# Altium PCB PCB_B.PcbDoc
Units mm, origin at the board's own origin, x right, y up, seen from the top; angles counter-clockwise.
Board outline 73.25 x 85.75 mm, 2 copper layers (Top Layer, Bottom Layer); 4 components, 0 nets, 8 pads, 0 vias.
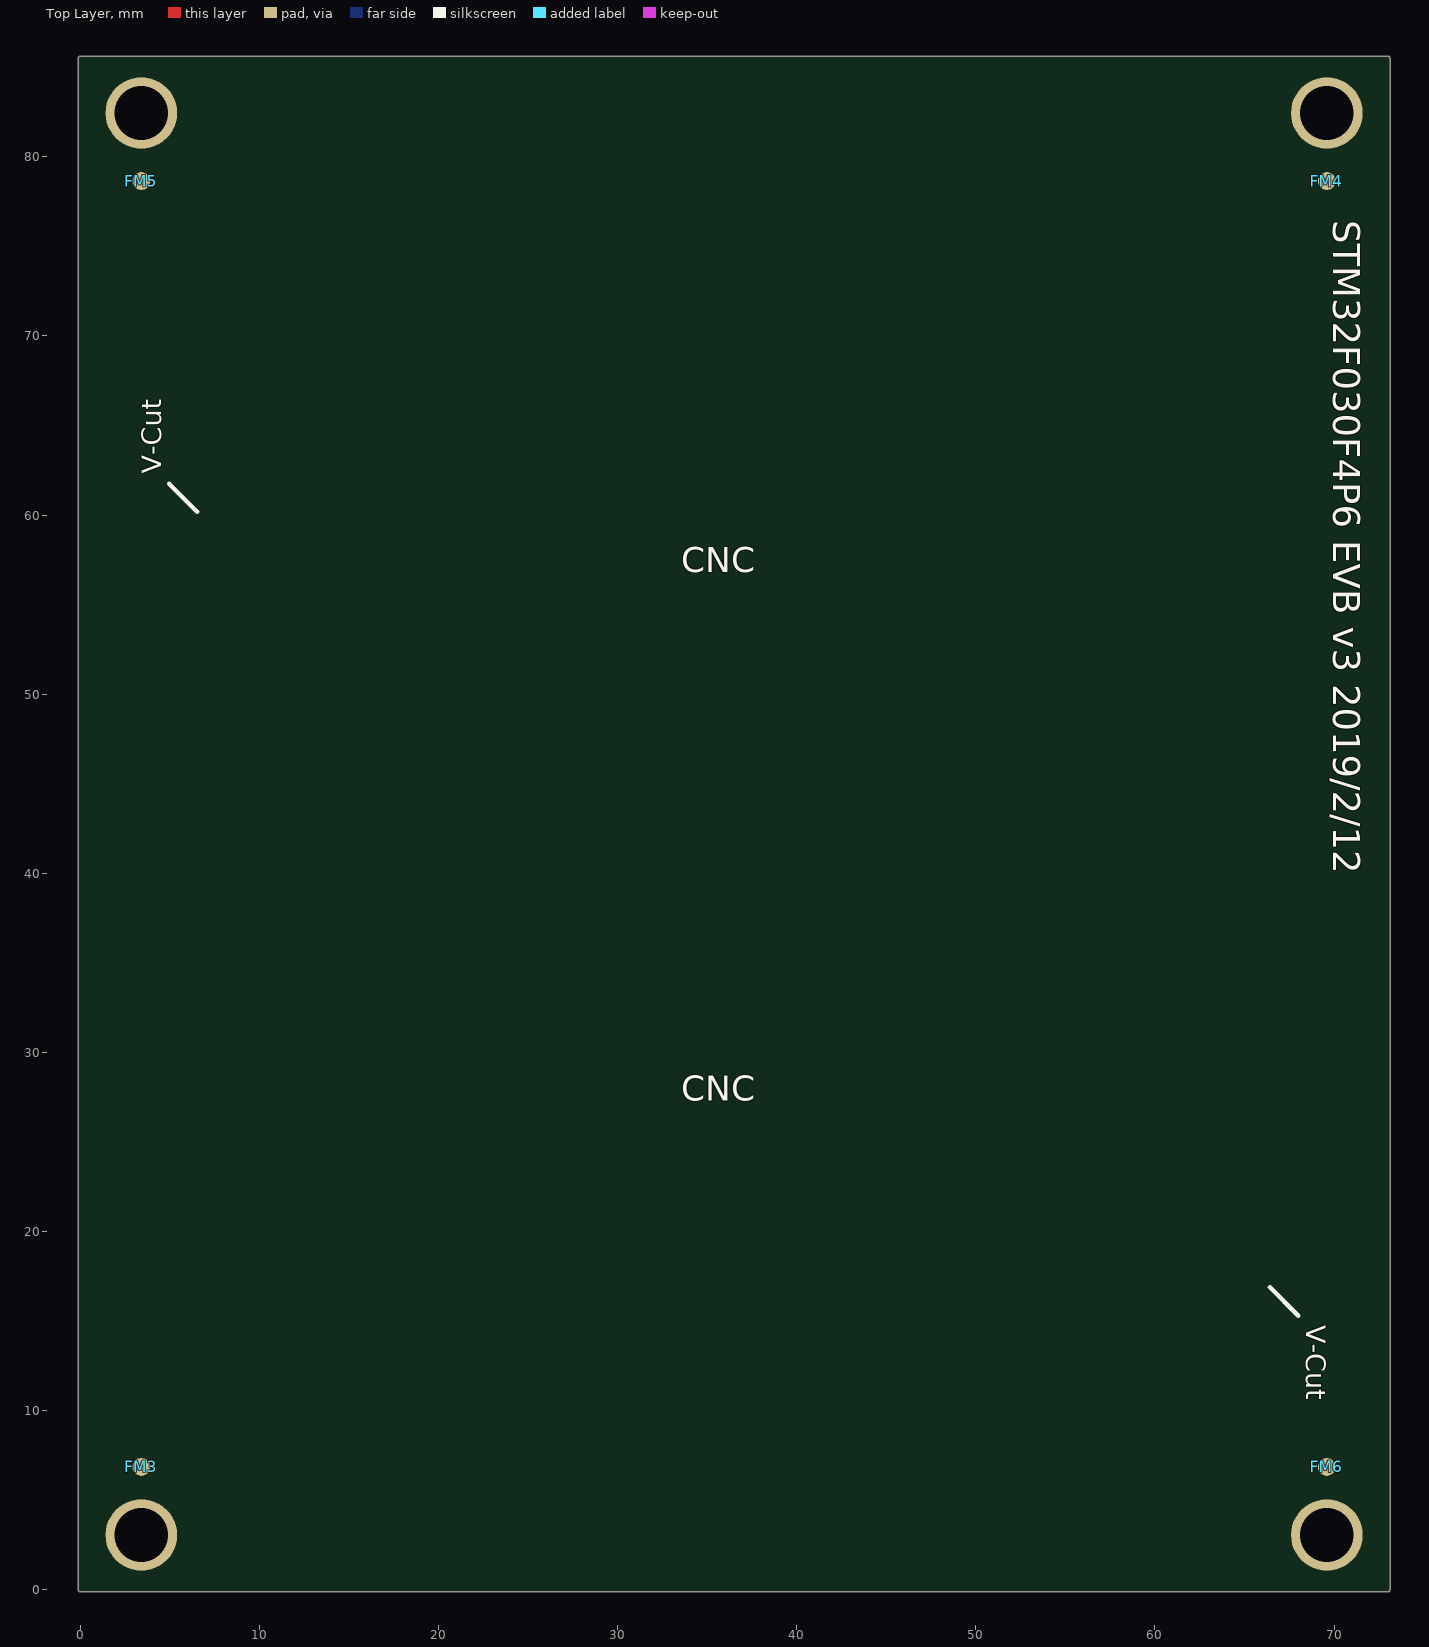
[diagram p0: Top Layer view]
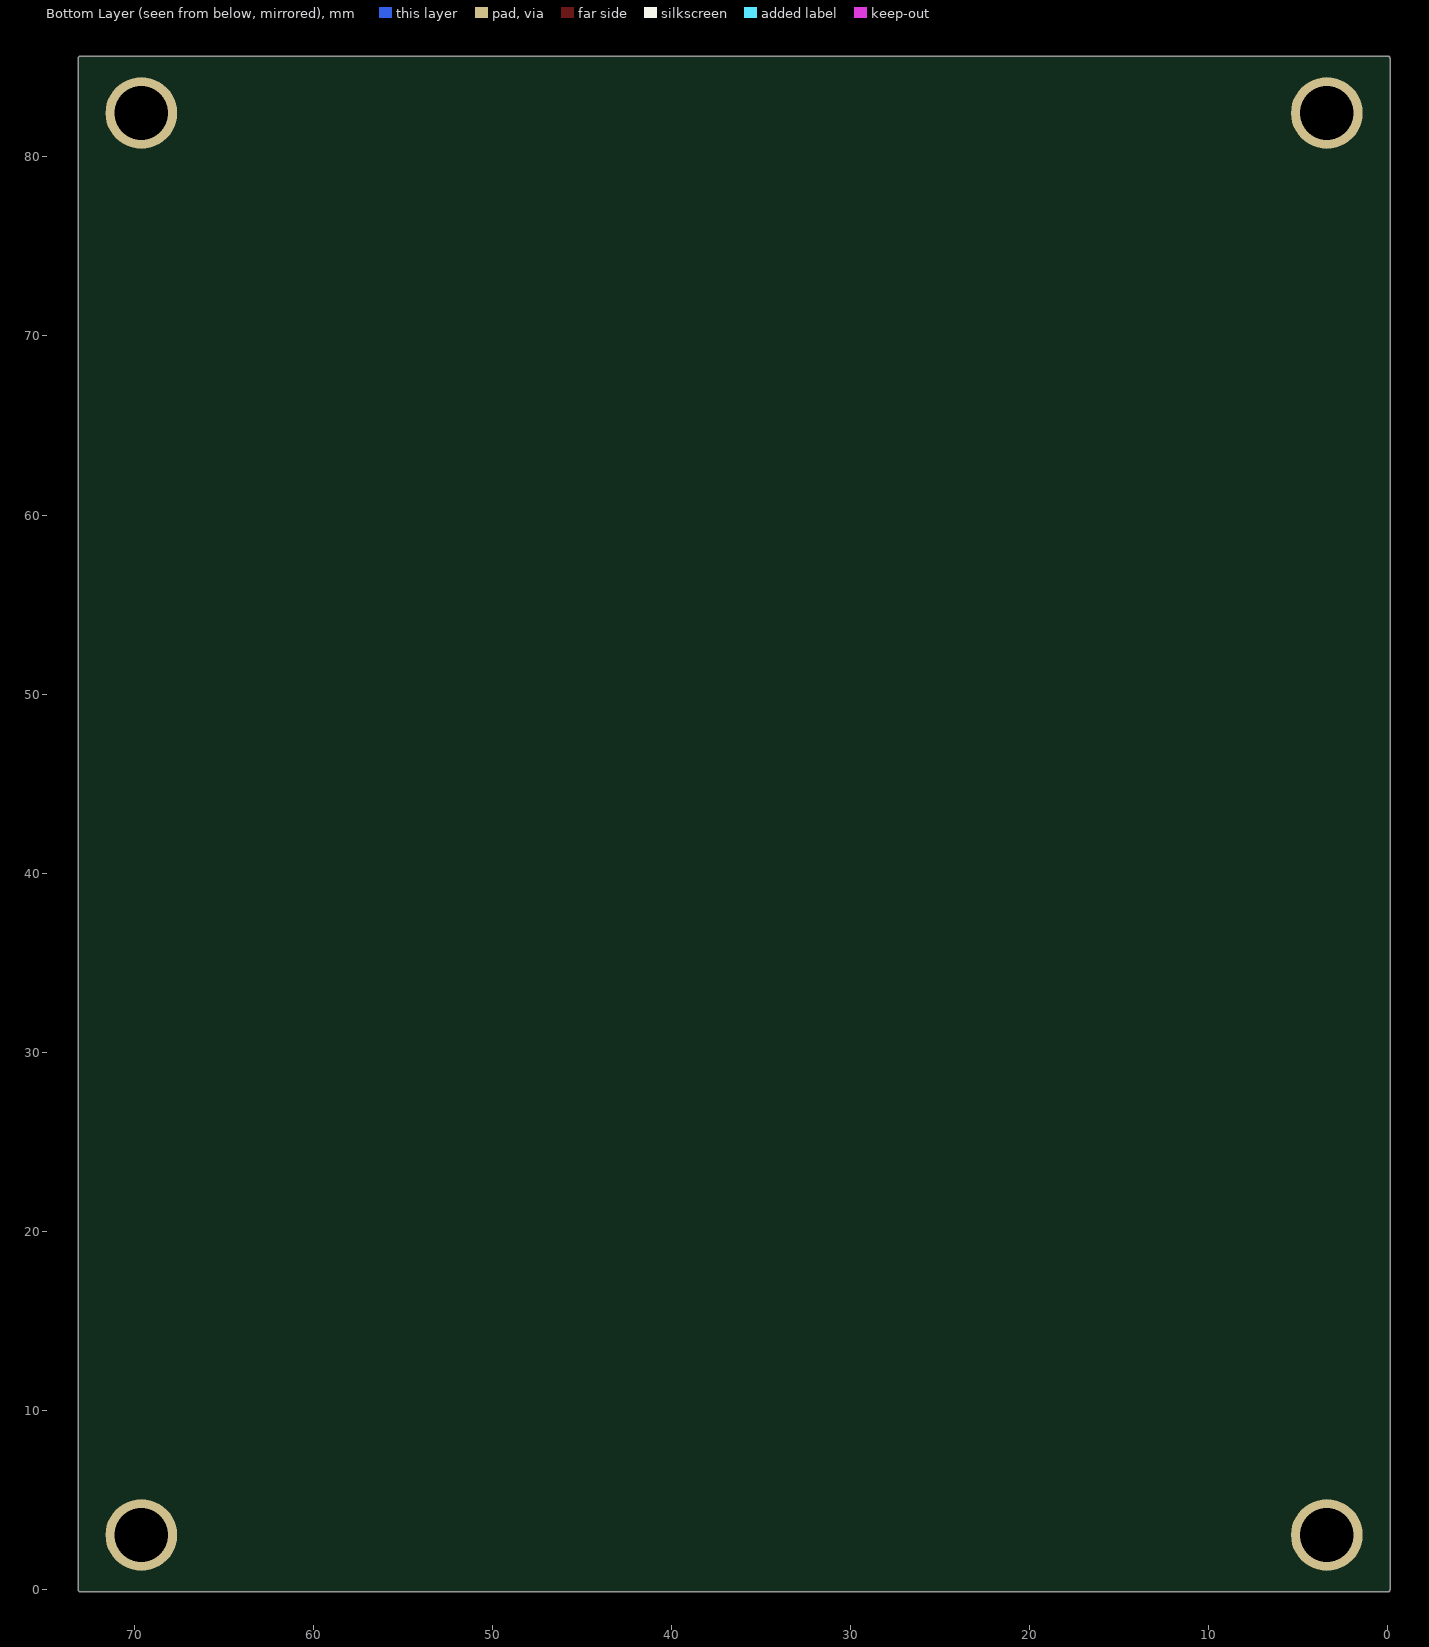
[diagram p1: Bottom Layer view, seen from below]

## Layer stack, top to bottom
Top Solder: solder mask 0.0102, Solder Resist, Dk 3.5
Top Layer: signal copper 0.0356
Dielectric 1: dielectric 0.32, FR-4, Dk 4.8
Bottom Layer: signal copper 0.0356
Bottom Solder: solder mask 0.0102, Solder Resist, Dk 3.5

## Board outline
-0.127,0 ccw(c0,0) 0,-0.127 73,-0.127 ccw(c73,0) 73.127,0 73.127,85.5 ccw(c73,85.5) 73,85.627 0,85.627 ccw(c0,85.5) -0.127,85.5

## Design rules (kind name [scope] priority, off if disabled: settings)
Clearance [All] p1: gap=0.254
PolygonConnect [All] p1: connectstyle=Relief reliefconductorwidth=0.254 reliefentries=4 polygonreliefangle="90 Angle" airgapwidth=0.254
RoutingVias [All] p1: holewidth=0.711 width=1.27 viastyle="Through Hole" minholewidth=0.711 minwidth=1.27 maxholewidth=0.711 maxwidth=1.27
SolderMaskExpansion [All] p1: expansion=0.102
Width [All] p1: maxlimit=0.254 minlimit=0.254 preferedwidth=0.254
30 further rules are at their usual default settings.

## Components (designator, comment, footprint, x,y, rotation, side; value= is the part's Value field where it differs from the comment)
FM3 "Comment" "Fiducial Mark" 3.4,6.85 r0 bottom
FM4 "Comment" "Fiducial Mark" 69.6,78.65 r180 bottom
FM5 "Comment" "Fiducial Mark" 3.4,78.65 r0 bottom
FM6 "Comment" "Fiducial Mark" 69.6,6.85 r180 bottom

## Footprints (in the part's own frame and the unit in brackets; to place one, negate y for a bottom-side part, rotate by r counter-clockwise, add the part's x,y. Pads: shape width x height; smd on the part's side, far side on the other; paste and mask are expansions set on the pad)
"Fiducial Mark" [mm]
  round 1 smd far side mask+0.5: 01(0,0)

## Free pads (board coordinates)
  round 4 hole 3: 2(3.4,3.05) 2(3.4,82.45) 2(69.6,3.05) 2(69.6,82.45)

## Nets (pads, with @x,y where several pads share a name; then routed paths per layer and width w, separated by ;. In a path a pad name is that pad's centre, name@x,y a point inside that pad or via, vN(x,y) a via of type N, cw(c..) or ccw(c..) an arc to the next point about the centre after c; other vN are vias at no path point)
pads on no net: FM3.01 FM4.01 FM5.01 FM6.01

## Silkscreen, mask and mechanical layers (free items; w line width, h text height)
Top Overlay:
  lines w0.254: 4.95,61.75 6.525,60.175 ; 66.425,16.875 68,15.3
  text "STM32F030F4P6 EVB v3 2019/2/12" at 69.95,76.45 h1.5 r270
  text "V-Cut" at 4.5,62.3 h1.1 r90
  text "CNC" at 33.55,56.8 h1.4
  text "CNC" at 33.55,27.3 h1.4
  text "V-Cut" at 68.45,14.75 h1.1 r270
Mechanical 1:
  lines w0.254: 7,26.5 7,0 ; 7,29.5 7,56 ; 7,59 7,85.5 ; 66,26.5 66,0 ; 66,29.5 66,56 ; 66,59 66,85.5 ; 7,0 0,0 0,85.5 7,85.5 ; 7,0 66,0 ; 7,85.5 66,85.5 ; 66,0 73,0 73,85.5 66,85.5 ; 6.75,26.5 cw(c6.75,28) 6.75,29.5 66.25,29.5 cw(c66.25,28) 66.25,26.5 6.75,26.5 ; 6.75,56 cw(c6.75,57.5) 6.75,59 66.25,59 cw(c66.25,57.5) 66.25,56 6.75,56

## Panel: embedded boards
"PCB1.PcbDoc" at 7,0, 3 rows x 1 columns, spacing 29.5 x 38.1, rotation 0